# EAGLE board 2LayerSMD_ATMEGA328 (EAGLE 9.0.0)
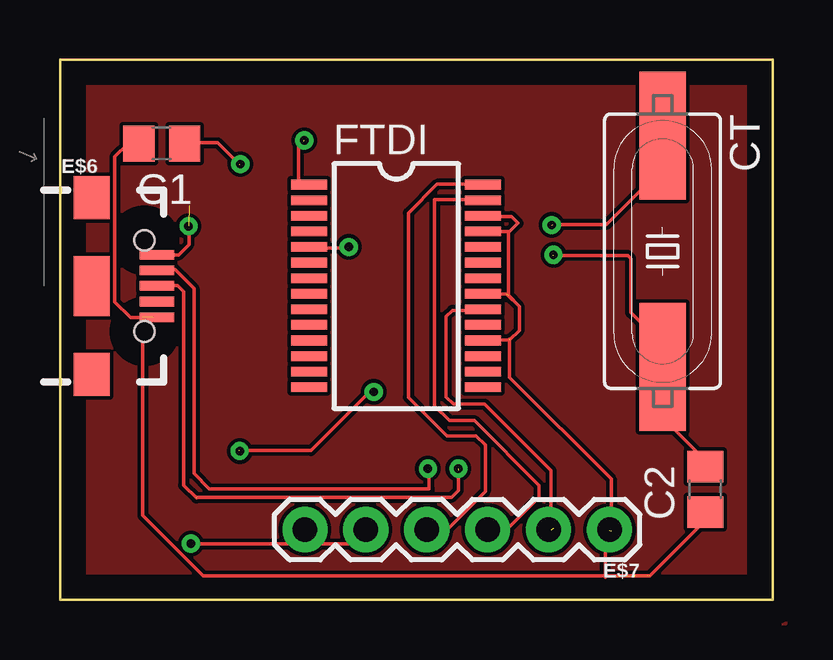
[diagram p0: board, top side]
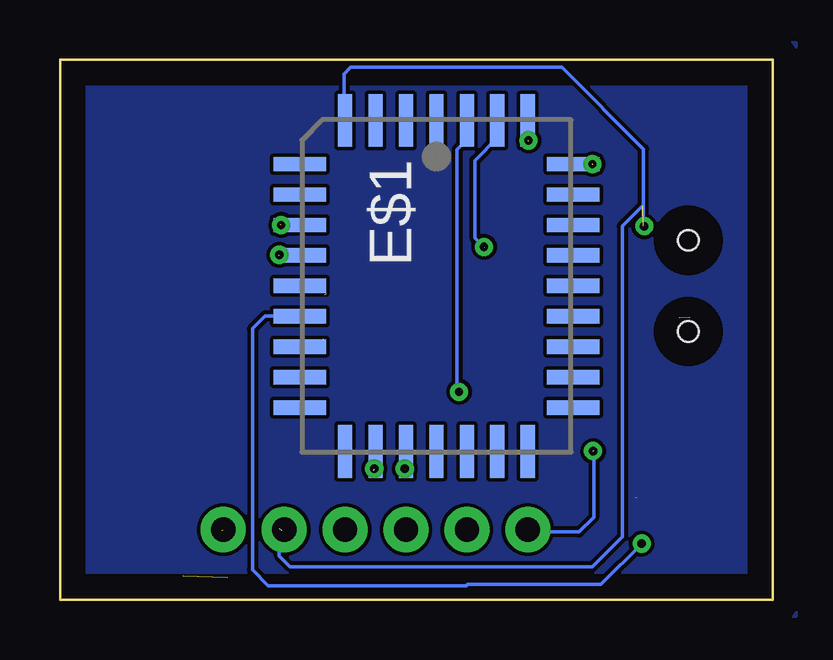
[diagram p1: board, bottom side, seen from below]

Size 29.72 x 22.5 mm. Coordinates in mm from the lower left corner, seen from the top.
Copper layers (1*16): Top 0.035mm / dielectric 1.5mm / Bottom 0.035mm
Design rules "default": minimum track width 6mil, minimum drill 0.35mm, track to track 6mil, track to pad 6mil, pad to pad 6mil, via to via 6mil, smd to smd 6mil, copper to edge 40mil, drill to drill 6mil, minimum pad ring 10mil, minimum via ring 8mil, stop-mask expansion 4mil, vias tented up to drill 0mil, thermal gap 10mil

## Footprints (pad centres in the part's own frame; a part is rotated, then mirrored left to right if it is on the bottom)
C0805 = smd 1.3 x 1.5: 1 -0.95,0; 2 0.95,0
HC49UP = smd 5.334 x 1.93: 1 -4.826,0; 2 4.826,0
PLCC32R = smd 0.6 x 2.2: 1 0,6.9; 2 -1.27,6.9; 3 -2.54,6.9; 4 -3.81,6.9; 14 -3.81,-6.9; 15 -2.54,-6.9; 16 -1.27,-6.9; 17 0,-6.9; 18 1.27,-6.9; 19 2.54,-6.9; 20 3.81,-6.9; 30 3.81,6.9; 31 2.54,6.9; 32 1.27,6.9 | smd 2.2 x 0.6: 5 -5.7,5.08; 6 -5.7,3.81; 7 -5.7,2.54; 8 -5.7,1.27; 9 -5.7,0; 10 -5.7,-1.27; 11 -5.7,-2.54; 12 -5.7,-3.81; 13 -5.7,-5.08; 21 5.7,-5.08; 22 5.7,-3.81; 23 5.7,-2.54; 24 5.7,-1.27; 25 5.7,0; 26 5.7,1.27; 27 5.7,2.54; 28 5.7,3.81; 29 5.7,5.08
USB-B-MICRO-SMD = smd 1.45 x 0.4: D+ 2.725,0; D- 2.725,0.65; GND 2.725,-1.3; ID 2.725,-0.65; VBUS 2.725,1.3 | smd 1.5 x 1.8: SHIELD1 0,3.685; SHIELD2 0,-3.685 | smd 1.5 x 2.5: SHIELD3 0,0 | hole 0.85: 2.2,1.9; 2.2,-1.9
1X06 = drill 1.016 pad 1.88: 1 0,0; 2 2.54,0; 3 5.08,0; 4 7.62,0; 5 10.16,0; 6 12.7,0
SSOP28 = smd 0.4 x 1.5: 1 -4.225,-3.625; 2 -3.575,-3.625; 3 -2.925,-3.625; 4 -2.275,-3.625; 5 -1.625,-3.625; 6 -0.975,-3.625; 7 -0.325,-3.625; 8 0.325,-3.625; 9 0.975,-3.625; 10 1.625,-3.625; 11 2.275,-3.625; 12 2.925,-3.625; 13 3.575,-3.625; 14 4.225,-3.625; 15 4.225,3.625; 16 3.575,3.625; 17 2.925,3.625; 18 2.275,3.625; 19 1.625,3.625; 20 0.975,3.625; 21 0.325,3.625; 22 -0.325,3.625; 23 -0.975,3.625; 24 -1.625,3.625; 25 -2.275,3.625; 26 -2.925,3.625; 27 -3.575,3.625; 28 -4.225,3.625

## Placement (x,y rotation side)
C1  [C0805]  4.24,19.02 180 top
C2  [C0805]  26.9,4.6 90 top
CT  [HC49UP]  25.12,14.53 270 top
E$1  [PLCC32R]  14.02,13.08 0 bottom
E$6  [USB-B-MICRO-SMD]  1.32,13.08 0 top
E$7  [1X06]  22.91,2.92 180 top
FTDI  [SSOP28]  14.02,13.08 270 top

## Library data of the parts
C1 C2 = eagle-ltspice
CT = crystal
E$1 = atmel
E$6 E$7 = SparkFun-Connectors
FTDI = analog-devices

## Tracks (layer width: path | path; a pad name or v marks a point on that pad's centre or on a via)
A1
  Top 0.152: 15.62,16.69 15.62,16.64 | 15.62,16.64 15.62,8.08 16.23,7.47 17.27,7.47 19.96,4.77 19.96,4.27 18.67,2.97 17.73,2.97 17.63,2.87 | 15.62,16.64 15.67,16.69 17.17,16.69
A2
  Top 0.152: 16.97,17.32 15.72,17.32 14.53,16.13 14.53,8.43 16.13,6.83 17.35,6.83 17.73,6.45 17.73,4.52 16.23,3.02 15.16,3.02
D1  (via drill 0.35)  (3 unrouted)
  Top 0.152: 12.98,8.74 10.46,6.22 7.47,6.22
  Bottom 0.152: 12.78,19.15 13.16,18.77 13.16,8.91 12.98,8.74 | 7.47,6.22 7.47,3.43 8.08,2.82 10.26,2.82 10.31,2.77
  other vias: 7.49,6.2
D+  (via drill 0.35)  (3 unrouted)
  Top 0.152: 5.69,4.27 16.33,4.27 16.61,4.55 16.61,5.36 16.64,5.38 | 4.04,13.11 4.9,13.11 5.16,12.85 5.16,4.77 5.69,4.24
  Bottom 0.152: 16.64,5.38 16.64,6.25
  other vias: 16.61,5.46
D-  (via drill 0.35)  (1 unrouted)
  Top 0.152: 4.17,13.77 4.8,13.77 5.59,12.98 5.59,5.26 6.22,4.62 15.39,4.62 15.39,5.38 15.34,5.44
  Bottom 0.152: 15.34,5.44 v15.34,5.46 15.34,6.22 15.32,6.25
GND  (5 unrouted)
  Top 0.152: 2.82,19 2.29,18.47 2.29,12.42 2.95,11.76 3.89,11.76 | 3.45,11.79 3.45,3.51 5.97,0.99 24.59,0.99 26.97,3.38 | 22.73,0.94 22.73,2.72 22.91,2.9 | 17.91,15.98 18.82,15.98 19.1,15.7 18.74,15.34 18.69,15.34 | 18.69,15.34 17.93,15.34 | 17.86,10.82 18.74,10.82 19.15,11.23 19.15,12.22 18.62,12.75 17.73,12.75 | 18.69,15.34 18.69,12.7 18.9,12.5 | 18.74,10.87 18.74,9.27 22.99,5.03 22.99,2.87
OSC1  (via drill 0.35)  (2 unrouted)
  Top 0.152: 25.09,17.96 22.78,15.65 20.55,15.65
  Bottom 0.152: 20.55,15.65 19.96,15.65 19.94,15.62
  other vias: 20.5,15.62
OSC2  (via drill 0.35)  (2 unrouted)
  Top 0.152: 25.3,10.46 23.8,11.96 23.8,14.22 23.67,14.35 20.57,14.35
  Bottom 0.152: 20.57,14.35 19.84,14.35
  other vias: 20.57,14.38
PWM  (via drill 0.35)
  Top 0.152: v5.46,2.34 12.27,2.34 12.85,2.92
  Bottom 0.152: 19.74,11.84 21.16,11.84 21.69,11.3 21.69,1.24 21.03,0.58 12.78,0.58 12.73,0.63 7.16,0.63 v5.46,2.34
RESET  (via drill 0.35)  (2 unrouted)
  Top 0.152: 5.18,19.05 6.58,19.05 7.49,18.14
  Bottom 0.152: 7.49,18.14 8.05,18.14
  other vias: 7.52,18.16
RXD  (via drill 0.35)  (1 unrouted)
  Top 0.152: 10.11,14.66 11.99,14.66 12.01,14.68
  Bottom 0.152: 12.01,14.68 v12.04,14.71 12.42,15.09 12.42,18.31 11.46,19.28
S$1
  Top 0.152: 25.02,9.02 25.02,7.7 26.87,5.84
S$2
  Top 0.152: 3.91,13.08 4.65,13.08
S$3  (via drill 0.35)
  other vias: 5.36,15.57
S$4
  pour Bottom: -0.43,23.14 30.18,23.14 30.18,-0.69 -0.97,-0.69 -0.97,1.17 -0.97,23.22 -0.36,23.22
S$5  (via drill 0.35)
  other vias: 13.08,8.66
S$6
  pour Top: -0.23,22.86 30.25,22.86 30.25,-1.02 -0.36,-1.02 -0.36,22.94
TXD  (via drill 0.35)  (2 unrouted)
  Top 0.152: 9.96,17.32 9.96,18.9 10.19,19.13
  Bottom 0.152: 10.19,19.13 10.34,19.28 10.34,19.43
  other vias: 10.19,19.15
VCC  (3 unrouted)
  Top 0.152: 3.99,14.38 4.95,14.38 5.38,14.81 5.38,15.57 | 17.2,12.06 16.36,12.06 16.1,11.81 16.1,8.46 16.41,8.15 17.7,8.15 20.47,5.38 20.47,2.9
  Bottom 0.152: 5.38,15.57 5.38,18.8 8.79,22.2 17.6,22.2 17.88,21.92 17.88,20.4 | 5.41,16.43 6.27,15.57 6.27,2.62 7.52,1.37 20.12,1.37 20.57,1.83 20.57,2.97